# Altium PCB 2.4寸液晶屏-V1.PcbDoc
Units mm, origin at the board's own origin, x right, y up, seen from the top; angles counter-clockwise.
Board outline 42 x 88 mm, 2 copper layers (Top Layer, Bottom Layer), stack 1.571 mm thick; 22 components, 26 nets, 115 pads, 83 vias.
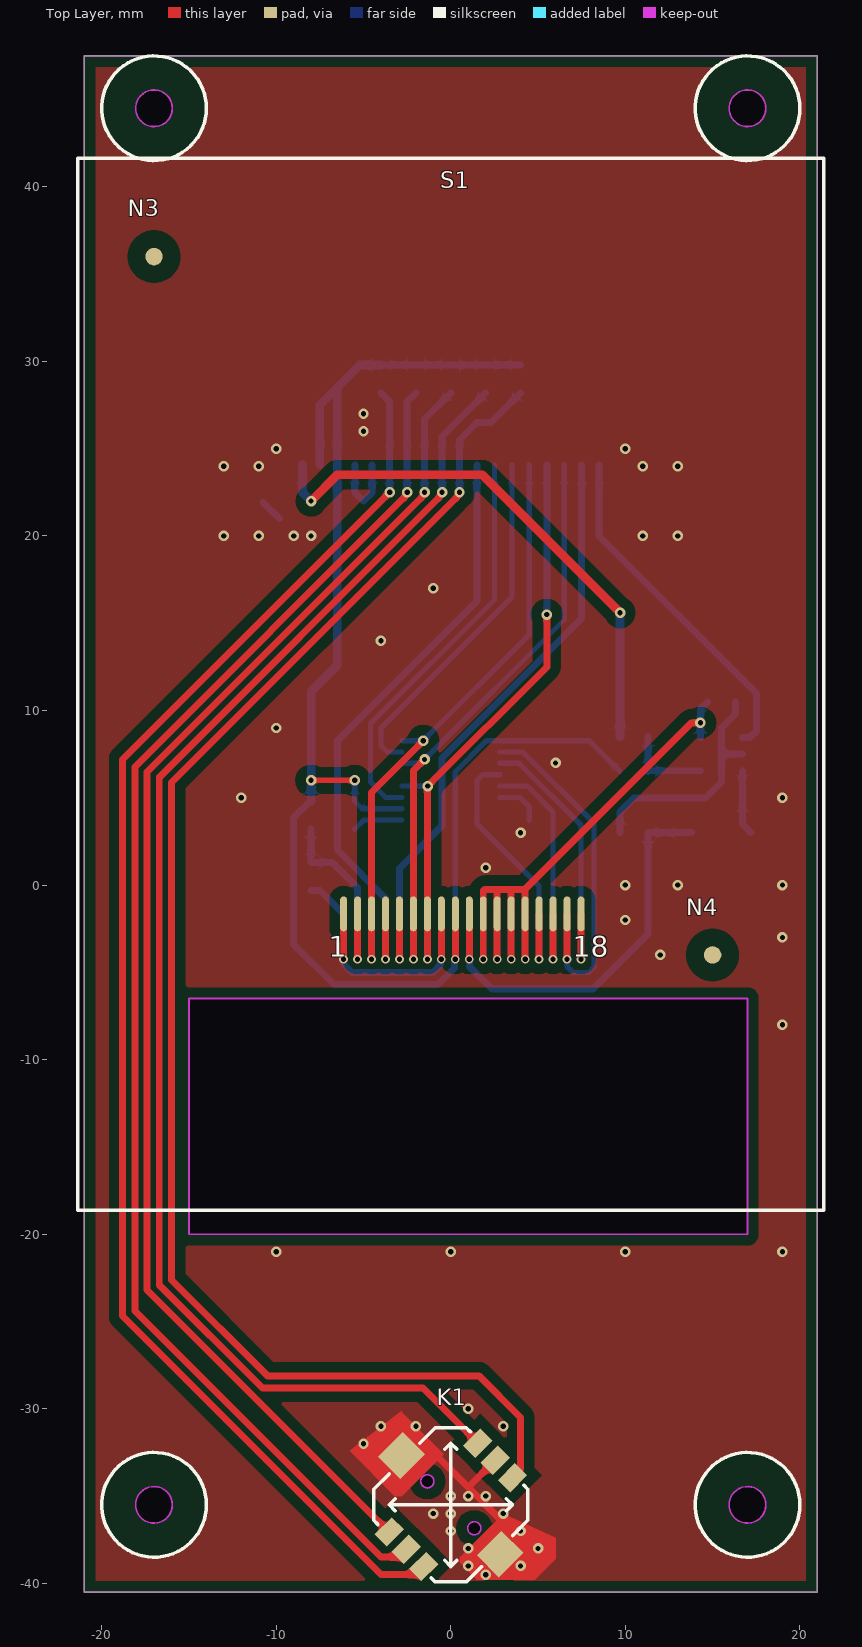
[diagram p0: Top Layer view]
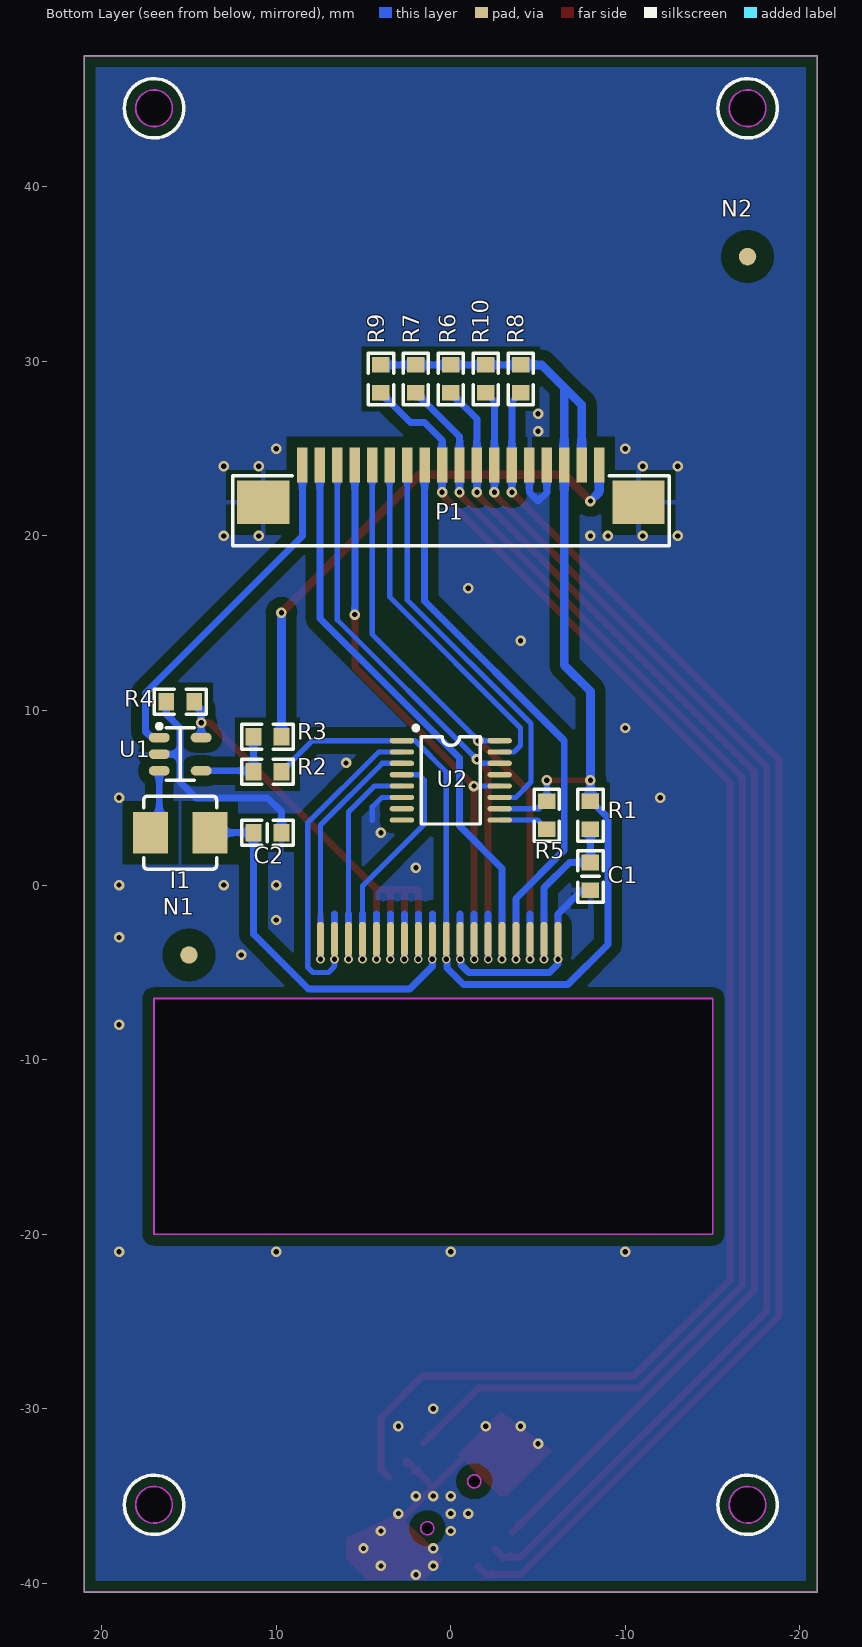
[diagram p1: Bottom Layer view, seen from below]
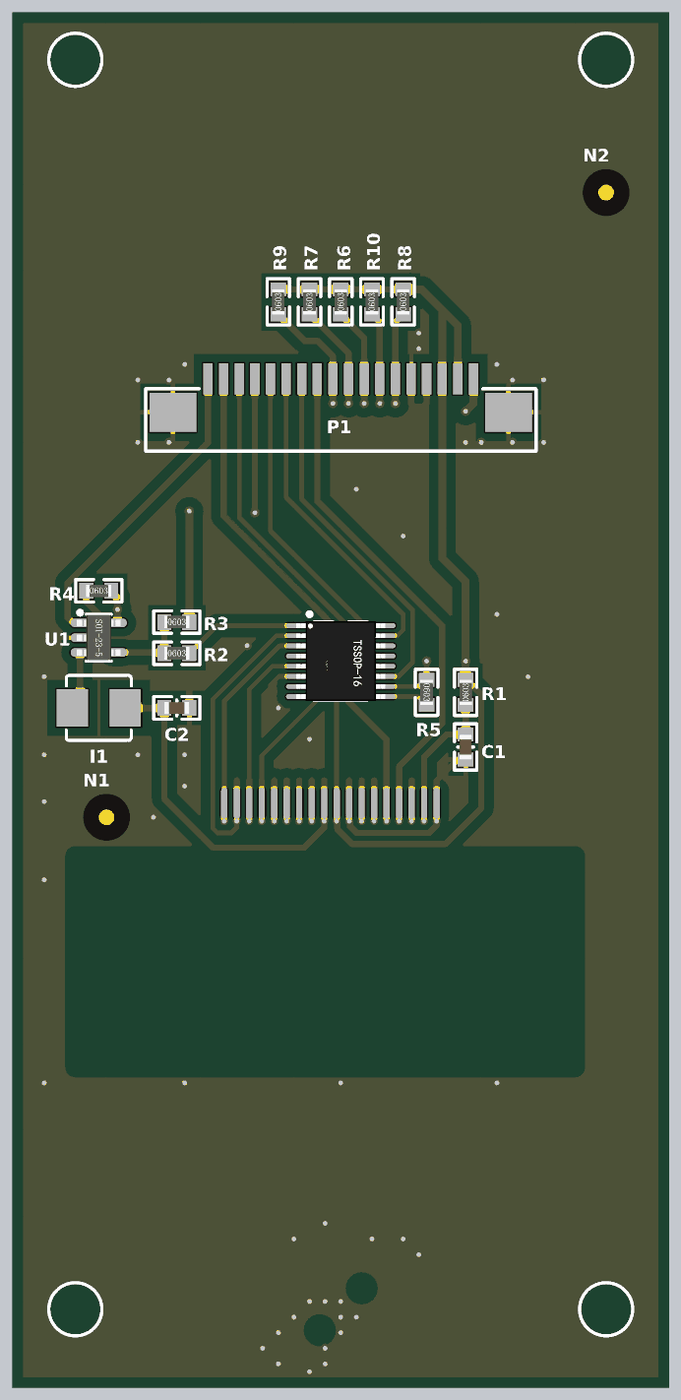
[diagram p2: 3D render of the assembled board from below, using the file's embedded part models]

## Layer stack, top to bottom
Top Solder: solder mask 0.0102, Solder Resist, Dk 3.5
Top Layer: signal copper 0.0356
Dielectric1: dielectric 1.5, FR-4, Dk 4.8
Bottom Layer: signal copper 0.0356
Bottom Solder: solder mask 0.0102, Solder Resist, Dk 3.5

## Board outline
-21,-40.5 21,-40.5 21,47.5 -21,47.5
cut-out: -15,-20 17,-20 17,-6.5 -15,-6.5
cut-out: -17,-36.55 cw(c-17,-35.5) -18.05,-35.5 cw(c-17,-35.5) -17,-34.45 cw(c-17,-35.5) -15.95,-35.5 cw(c-17,-35.5)
cut-out: 17,-36.55 cw(c17,-35.5) 15.95,-35.5 cw(c17,-35.5) 17,-34.45 cw(c17,-35.5) 18.05,-35.5 cw(c17,-35.5)
cut-out: -17,45.55 ccw(c-17,44.5) -18.05,44.5 ccw(c-17,44.5) -17,43.45 ccw(c-17,44.5) -15.95,44.5 ccw(c-17,44.5)
cut-out: 17,45.55 ccw(c17,44.5) 15.95,44.5 ccw(c17,44.5) 17,43.45 ccw(c17,44.5) 18.05,44.5 ccw(c17,44.5)

## Design rules (kind name [scope] priority, off if disabled: settings)
Clearance Clearance敷铜间隔 [InPolygon] p1: gap=0.6
Clearance Clearance通用间隔 [All] p2: gap=0.3
PlaneConnect [All] p1: planeconnectstyle=Relief reliefexpansion=0.508 reliefentries=4 reliefconductorwidth=0.3 reliefairgap=0.3
PolygonConnect PolygonConnect_过孔 [All vs IsVia] p1: connectstyle=Direct reliefconductorwidth=0.254 reliefentries=4 polygonreliefangle="90 Angle" airgapwidth=0.254
PolygonConnect [All] p2: connectstyle=Relief reliefconductorwidth=0.3 reliefentries=4 polygonreliefangle="90 Angle" airgapwidth=0.6
RoutingVias [All] p1: holewidth=0.5 width=1 viastyle="Through Hole" minholewidth=0.4 minwidth=0.8 maxholewidth=10 maxwidth=10
SolderMaskExpansion [All] p1: expansion=0.102
Width [All] p1: maxlimit=10 minlimit=0.3 preferedwidth=0.5
29 further rules are at their usual default settings.

## Components (designator, comment, footprint, x,y, rotation, side; value= is the part's Value field where it differs from the comment)
C1 "104" C-0603 -8,0.5 r90 bottom
C2 "106" C-0603 10.5,3 r0 bottom
I1 "2.2UH" 一体成型电感0420 15.5,3 r180 bottom
K1 "SKRHABE010" SKRHABE010 0,-35.5 r45 top
N1 "光学定位点" MARK-1mm-3mm 15,-4 r180 bottom
N2 "光学定位点" MARK-1mm-3mm -17,36 r180 bottom
N3 "光学定位点" MARK-1mm-3mm -17,36 r0 top
N4 "光学定位点" MARK-1mm-3mm 15,-4 r0 top
P1 "FPC-1.0mm-18P" FPC-1.0mm_18P下接翻盖 0,23 r0 bottom
R1 "10K" R-0603 -8,4 r90 bottom
R2 "NC" R-0603 10.5,6.5 r180 bottom
R3 "0" R-0603 10.5,8.5 r180 bottom
R4 "1.3" R-0603 15.5,10.5 r180 bottom
R5 "NC" R-0603 -5.5,4 r270 bottom
R6 "10K" R-0603 0,29 r90 bottom
R7 "10K" R-0603 2,29 r90 bottom
R8 "10K" R-0603 -4,29 r90 bottom
R9 "10K" R-0603 4,29 r90 bottom
R10 "10K" R-0603 -2,29 r90 bottom
S1 "HT024SQV003NH" HT024SQV003NH 0,11.5 r0 top locked
U1 "LN2401" SOT-23-5-n 15.5,7.5 r0 bottom
U2 "XPT2046" TSSOP-16 0,6 r270 bottom

## Footprints (in the part's own frame and the unit in brackets; to place one, negate y for a bottom-side part, rotate by r counter-clockwise, add the part's x,y. Pads: shape width x height; smd on the part's side, far side on the other; paste and mask are expansions set on the pad)
C-0603 [mm]
  rect 0.9x1 smd: 1(-0.8,0) 2(0.8,0)
  silkscreen extent -1.48,-0.72 1.48,0.72, body extent -0.8,-0.4 0.8,0.4, height 0.6
FPC-1.0mm_18P下接翻盖 [mm]
  rect 0.6x2 smd: 1(-8.5,-1.075) 2(-7.5,-1.075) 3(-6.5,-1.075) 4(-5.5,-1.075) 5(-4.5,-1.075) 6(-3.5,-1.075) 7(-2.5,-1.075) 8(-1.5,-1.075) 9(-0.5,-1.075) 10(0.5,-1.075) 11(1.5,-1.075) 12(2.5,-1.075) 13(3.5,-1.075) 14(4.5,-1.075) 15(5.5,-1.075) 16(6.5,-1.075) 17(7.5,-1.075) 18(8.5,-1.075)
  rect 3x2.5 smd: 19(-10.75,1.075) 20(10.75,1.075)
  silkscreen extent -12.51,-0.44 12.49,3.56
HT024SQV003NH [mm]
  oval 0.4x2 smd: 1(-6.14,-13.15) 2(-5.34,-13.15) 3(-4.54,-13.15) 4(-3.74,-13.15) 5(-2.94,-13.15) 6(-2.14,-13.15) 7(-1.34,-13.15) 8(-0.54,-13.15) 9(0.26,-13.15) 10(1.06,-13.15) 11(1.86,-13.15) 12(2.66,-13.15) 13(3.46,-13.15) 14(4.26,-13.15) 15(5.06,-13.15) 16(5.86,-13.15) 17(6.66,-13.15) 18(7.46,-13.15)
  silkscreen extent -21.36,-30.13 21.36,30.13, body extent -21.36,-30.13 21.36,30.13, height 3.45
MARK-1mm-3mm [mm]
  round 1 smd paste-0.6 mask+1: 1(0,0)
  Top Layer pour cut-out: -1.5,0 -1.386,-0.574 -1.061,-1.061 -0.574,-1.386 0,-1.5 0,-1.5 0.574,-1.386 1.061,-1.061 1.386,-0.574 1.5,0 1.5,0 1.386,0.574 1.061,1.061 0.574,1.386 0,1.5 0,1.5 -0.574,1.386 -1.061,1.061 -1.386,0.574 -1.5,0
R-0603 [mm]
  rect 0.9x1 smd: 1(-0.8,0) 2(0.8,0)
  silkscreen extent -1.48,-0.72 1.48,0.72, body extent -0.8,-0.4 0.8,0.4, height 0.45
SKRHABE010 [mm]
  rect 1.4x1 smd: 1(-3.6,1.4) 2(-3.6,0) 3(-3.6,-1.4) 4(3.6,1.4) 5(3.6,0) 6(3.6,-1.4)
  rect 2x1.8 smd: 7(0,4) 7(0,-4)
  Keep-Out Layer circle w0.1: c0,-1.9 r0.375
  Keep-Out Layer circle w0.1: c0,1.9 r0.375
  Keep-Out Layer board cut-out: -0.375,-1.9 -0.346,-2.044 -0.265,-2.165 -0.144,-2.246 0,-2.275 0,-2.275 0.144,-2.246 0.265,-2.165 0.346,-2.044 0.375,-1.9 0.375,-1.9 0.346,-1.756 0.265,-1.635 0.144,-1.554 0,-1.525 0,-1.525 -0.144,-1.554 -0.265,-1.635 -0.346,-1.756 -0.375,-1.9
  Keep-Out Layer board cut-out: -0.375,1.9 -0.346,1.756 -0.265,1.635 -0.144,1.554 0,1.525 0,1.525 0.144,1.554 0.265,1.635 0.346,1.756 0.375,1.9 0.375,1.9 0.346,2.044 0.265,2.165 0.144,2.246 0,2.275 0,2.275 -0.144,2.246 -0.265,2.165 -0.346,2.044 -0.375,1.9
  silkscreen extent -3.75,-3.75 3.75,3.75
SOT-23-5-n [mm]
  oval 1.2x0.55 smd: 1(1.2,-0.95) 2(1.2,0) 3(1.2,0.95) 4(-1.2,0.95) 5(-1.2,-0.95)
  silkscreen extent -0.8,-1.7 1.3,1.5, body extent -1.4,-1.45 1.4,1.45, height 1.2
TSSOP-16 [mm]
  oval 0.3x1.4 smd: 1(-2.275,-2.8) 2(-1.625,-2.8) 3(-0.975,-2.8) 4(-0.325,-2.8) 5(0.325,-2.8) 6(0.975,-2.8) 7(1.625,-2.8) 8(2.275,-2.8) 9(2.275,2.8) 10(1.625,2.8) 11(0.975,2.8) 12(0.325,2.8) 13(-0.325,2.8) 14(-0.975,2.8) 15(-1.625,2.8) 16(-2.275,2.8)
  silkscreen extent -3.12,-2.13 2.5,1.7, body extent -2.55,-2.85 2.55,2.85, height 1.45
一体成型电感0420 [mm]
  rect 2x2.4 smd: 1(-1.7,0) 2(1.7,0)
  silkscreen extent -2.08,-2.08 2.08,2.08, body extent -2.08,-2.08 2.08,2.08, height 2

## Part data
C1: library part Cap-0603, "0805"
C2: library part Cap-0805, "0805"
I1: library part Inductance3
K1: "五向开关"
N1 N2 N3 N4: library part 无引脚
P1: library part "Header 20", "Header, 20-Pin"
R1 R2 R3 R5 R6 R7 R8 R9 R10: library part Res2-0603, "0603"
R4: library part Res2, "0805"
U1: library part PAM2804, "DC-DC降压"

## Free pads (board coordinates)
  oval 0.4x2 smd far side: 1(-6.14,-3.1) 2(-5.34,-3.1) 3(-4.54,-3.1) 4(-3.74,-3.1) 5(-2.94,-3.1) 6(-2.14,-3.1) 7(-1.34,-3.1) 8(-0.54,-3.1) 9(0.26,-3.1) 10(1.06,-3.1) 11(1.86,-3.1) 12(2.66,-3.1) 13(3.46,-3.1) 14(4.26,-3.1) 15(5.06,-3.1) 16(5.86,-3.1) 17(6.66,-3.1) 18(7.46,-3.1)

## Via types
v1: diameter 0.6, hole 0.3, Top Layer to Bottom Layer, tented both sides, 65 vias
v2: diameter 0.5, hole 0.3, Top Layer to Bottom Layer, tented both sides, 18 vias

## Nets (pads, with @x,y where several pads share a name; then routed paths per layer and width w, separated by ;. In a path a pad name is that pad's centre, name@x,y a point inside that pad or via, vN(x,y) a via of type N, cw(c..) or ccw(c..) an arc to the next point about the centre after c; other vN are vias at no path point)
3.3V: P1.2 P1.3 pad.9 R1.2 R2.2 R5.1 R6.2 R7.2 R8.2 R9.2 R10.2 S1.9 U2.1 U2.10 | length 90.8
  Top Layer w0.3: v1(-8,6) v1(-5.5,6)
  Top Layer w0.4: v2(0.26,-4.25) S1.9
  Bottom Layer w0.3: v1(-5.5,6) R5.1 -5.075,4.375 U2.10 ; pad.9 0.26,6.484 2.051,8.275 U2.1 7.925,8.275 R2.2
  Bottom Layer w0.4: R1.2 -8.057,4.8 -9,3.857 -9,-3.4 -6.7,-5.7 -0.739,-5.7 0.21,-4.751 0.21,-4.3 v2(0.26,-4.25) pad.9 ; R8.2 R10.2 R6.2 R7.2 R9.2
  Bottom Layer w0.5: R1.2 v1(-8,6) -8,11.1 -6.5,12.6 P1.3 -6.5,28.5 ; P1.2 -7.5,27.5 -6.5,28.5 ; R8.2 -5.2,29.8 -6.5,28.5
5V: P1.1 R3.2 | length 31
  Top Layer w0.5: v1(-8,22) -6.5,23.5 1.8,23.5 v1(9.7,15.6)
  Bottom Layer w0.5: P1.1 -8.5,22.5 v1(-8,22) ; R3.2 v1(9.7,15.6)
GND: C1.1 C2.1 K1.5 K1.7 P1.4 P1.5 P1.19 P1.20 pad.1 pad.8 R4.1 S1.1 S1.8 U1.2 U2.6 | length 53.4
  Top Layer w0.4: v2(-6.14,-4.25) S1.1 ; K1.7@-2.828,-32.672 -0.828,-32.672 1.1,-34.6 ; v2(-0.54,-4.25) S1.8 ; K1.5@2.546,-33.154 K1.5 1.1,-34.4 1.1,-34.6 ; K1.7@2.828,-38.328 2.828,-36.328 1.1,-34.6
  Bottom Layer w0.3: U2.6 3.957,5.025 4.5,4.482 4.5,3.7
  Bottom Layer w0.4: P1.19 P1.19@-9.825,21 ; C1.1 -7.49,-0.3 -6.14,-1.65 pad.1 v2(-6.14,-4.25) -6.14,-4.511 -5.651,-5 -1.029,-5 -0.59,-4.561 -0.59,-4.3 v2(-0.54,-4.25) pad.8 -0.54,-1.65 ; P1.4 -5.5,22.5 -5,22 -4.5,22.5 P1.5 ; C2.1 9.7,4.2 10.5,5 14.6,5 15.5,5.9 15.5,9 16.3,9.8 R4.1 ; 15.5,7.5 U1.2
  other v1: 2,-39.5 1,-39 4,-39 1,-38 5,-38 0,-37 4,-37 -1,-36 0,-36 3,-36 0,-35 1,-35 2,-35 -5,-32 -4,-31 -2,-31 3,-31 1,-30 -10,-21 0,-21 10,-21 19,-21 19,-8 12,-4 19,-3 10,-2 10,0 13,0 19,0 2,1 4,3 -12,5 19,5 6,7 -10,9 -4,14 -1,17 -13,20 -11,20 -9,20 -8,20 11,20 13,20 -13,24 -11,24 11,24 13,24 -10,25 10,25 -5,26 -5,27
MISO: P1.15 pad.7 S1.7 U2.12 | length 35.2
  Top Layer w0.4: v2(-1.34,-4.25) S1.7 -1.34,5.66 v1(-1.325,5.675) 5.5,12.5 v1(5.5,15.5)
  Bottom Layer w0.3: U2.12 v1(-1.325,5.675)
  Bottom Layer w0.4: v2(-1.34,-4.25) pad.7 -1.34,-1.65 ; v1(5.5,15.5) P1.15
MOSI: P1.16 pad.6 S1.6 U2.14 | length 35.9
  Top Layer w0.4: v2(-2.14,-4.25) S1.6 -2.14,6.56 v1(-1.5,7.2)
  Bottom Layer w0.3: U2.14 -1.725,6.975 v1(-1.5,7.2) 6.5,15.2 P1.16
  Bottom Layer w0.4: v2(-2.14,-4.25) pad.6 -2.14,-1.65
NetC1_2: C1.2 pad.2 R1.1 S1.2 | length 11.9
  Top Layer w0.4: v2(-5.34,-4.25) S1.2
  Bottom Layer w0.4: R1.1 C1.2 -6.79,1.3 -5.34,-0.15 pad.2 v2(-5.34,-4.25)
NetC2_2: C2.2 I1.2 pad.10 S1.10 | length 26
  Top Layer w0.4: v2(1.06,-4.25) S1.10
  Bottom Layer w0.4: 1.06,-1.65 pad.10 v2(1.06,-4.25) 1.06,-4.66 2.35,-5.95 8.15,-5.95 11.3,-2.8 C2.2 I1.2
NetI1_1: I1.1 U1.3 | length 3.8
  Bottom Layer w0.4: U1.3 16.7,3.5 I1.1
NetR2_1: R2.1 R3.1 U1.4 | length 5
  Bottom Layer w0.4: R3.1 R2.1 11.35,6.55 U1.4
NetR4_2: pad.11 pad.12 pad.13 pad.14 R4.2 S1.11 S1.12 S1.13 S1.14 U1.5 | length 44.9
  Top Layer w0.4: v2(1.86,-4.25) S1.11 1.86,-0.34 1.96,-0.24 4.26,-0.24 ; v2(2.66,-4.25) S1.12 2.66,-0.28 ; v2(3.46,-4.25) S1.13 3.46,-0.28 ; v2(4.26,-4.25) S1.14 4.26,-0.24 ; v1(14.3,9.3) 13.8,9.3 4.26,-0.24
  Bottom Layer w0.4: v2(1.86,-4.25) pad.11 1.86,-1.65 ; v2(2.66,-4.25) pad.12 2.66,-1.65 ; v2(3.46,-4.25) pad.13 3.46,-1.65 ; v2(4.26,-4.25) pad.14 4.26,-1.65 ; U1.5 14.3,10.1 R4.2
NetR5_2: R5.2 U2.9 | length 2.9
  Bottom Layer w0.3: R5.2 -4.975,3.725 U2.9
RS/AO: P1.11 pad.4 S1.4 | length 35.4
  Top Layer w0.4: v2(-3.74,-4.25) S1.4
  Bottom Layer w0.4: v2(-3.74,-4.25) pad.4 -3.74,-0.76 -6.5,2 -6.5,8.268 1.5,16.268 P1.11
SCK: P1.14 pad.3 S1.3 U2.16 | length 35.9
  Top Layer w0.4: v2(-4.54,-4.25) S1.3 -4.54,5.309 v1(-1.574,8.275)
  Bottom Layer w0.3: U2.16 v1(-1.574,8.275) 4.5,14.349 P1.14
  Bottom Layer w0.4: v2(-4.54,-4.25) pad.3 -4.54,-1.65
XN: pad.15 S1.15 U2.4 | length 15.8
  Top Layer w0.4: v2(5.06,-4.25) S1.15
  Bottom Layer w0.3: U2.4 1.825,6.325 1.5,6 1.5,3.5 5.06,-0.06 5.06,-1.65
  Bottom Layer w0.4: v2(5.06,-4.25) pad.15 5.06,-1.65
XP: pad.17 S1.17 U2.2 | length 22.8
  Top Layer w0.4: v2(6.66,-4.25) S1.17
  Bottom Layer w0.3: U2.2 4.124,7.625 8.2,3.549 8.2,-4.7 7.9,-5 7,-5 6.66,-4.66 v2(6.66,-4.25) pad.17@6.66,-3.5
  Bottom Layer w0.4: pad.17@6.66,-3.5 pad.17 6.66,-1.65
YN: pad.16 S1.16 U2.5 | length 14.7
  Top Layer w0.4: v2(5.86,-4.25) S1.16
  Bottom Layer w0.3: U2.5 4.376,5.675 5.86,4.191 5.86,-1.65
  Bottom Layer w0.4: v2(5.86,-4.25) pad.16 5.86,-1.65
YP: pad.18 S1.18 U2.3 | length 16.4
  Top Layer w0.4: v2(7.46,-4.25) S1.18
  Bottom Layer w0.3: U2.3 3.925,6.975 7.46,3.44 pad.18
  Bottom Layer w0.4: v2(7.46,-4.25) pad.18
屏幕CS: P1.17 pad.5 S1.5 | length 35.2
  Top Layer w0.4: v2(-2.94,-4.25) S1.5
  Bottom Layer w0.4: v2(-2.94,-4.25) pad.5 -2.94,0.96 -0.5,3.4 -0.5,7.281 7.5,15.281 P1.17
按键-上: K1.1 P1.8 R6.1 | length 78.2
  Top Layer w0.4: K1.1 -17.4,-23.191 -17.4,6.469 -1.5,22.369 v1(-1.5,22.5)
  Bottom Layer w0.4: v1(-1.5,22.5) P1.8 -1.5,26.7 R6.1
按键-下: K1.4 P1.9 R7.1 | length 80.9
  Top Layer w0.4: v1(-0.5,22.5) -0.5,22.369 -16.7,6.169 -16.7,-22.901 -10.792,-28.809 -1.6,-28.809 K1.4
  Bottom Layer w0.4: v1(-0.5,22.5) P1.9 -0.5,25.7 R7.1
按键-中: K1.2 P1.7 R10.1 | length 80.9
  Top Layer w0.4: K1.2 -3,-38.5 -4,-38.5 -18.1,-24.4 -18.1,6.769 -2.5,22.369 v1(-2.5,22.5)
  Bottom Layer w0.4: v1(-2.5,22.5) P1.7 -2.5,27.7 R10.1
按键-右: K1.6 P1.10 R9.1 | length 86.5
  Top Layer w0.4: v1(0.5,22.5) 0.5,22.369 -16,5.869 -16,-22.611 -10.502,-28.109 1.609,-28.109 4,-30.5 4,-33.48 K1.6
  Bottom Layer w0.4: v1(0.5,22.5) P1.10 0.5,25.5 1.5,26.5 2.3,26.5 R9.1
按键-左: K1.3 P1.6 R8.1 | length 83
  Top Layer w0.4: v1(-3.5,22.5) -18.8,7.2 -18.8,-24.69 -3.99,-39.5 -2.02,-39.5 K1.3
  Bottom Layer w0.4: R8.1 -3.5,27.7 P1.6 v1(-3.5,22.5)
背光使能: P1.18 U1.1 | length 19.9
  Bottom Layer w0.4: P1.18 8.5,20 17.5,11 17.5,8.8 17.15,8.45 U1.1
触摸CS: P1.13 U2.15 | length 20.5
  Bottom Layer w0.3: U2.15 -3.625,7.625 -4,8 -4,9 3.5,16.5 P1.13
触摸中断: P1.12 U2.11 | length 23.3
  Bottom Layer w0.3: U2.11 -3.725,5.025 -4.6,5.9 -4.6,9.249 2.5,16.349 P1.12
pads on no net: N1.1 N2.1 N3.1 N4.1 U2.7 U2.8 U2.13

## Polygon pours and split planes (outlines as drawn)
GND on Top Layer "Mechanical 15-No Net" (solid, remove dead copper, pour order 0): 21,47.5 -21,47.5 -21,-40.5 21,-40.5
GND on Bottom Layer "Mechanical 15-No Net" (solid, remove dead copper, pour order 2): -21,-40.5 21,-40.5 21,47.5 -21,47.5

## Keep-outs
Keep-Out Layer:
  circle w0.1: c-17,-35.5 r1.05
  circle w0.1: c17,-35.5 r1.05
  circle w0.1: c-17,44.5 r1.05
  circle w0.1: c17,44.5 r1.05
  lines w0.1: -21,-40.5 21,-40.5 21,47.5 -21,47.5 -21,-40.5 ; -15,-20 -15,-6.5 17,-6.5 17,-20 -15,-20

## Other copper
Top Layer:
  region net GND: -2.8,-30.1 -2.8,-30.2 -0.4,-32.6 -2.8,-35 -3.2,-35 -5.8,-32.4
  region net GND: 3,-36 0.5,-38.5 0.5,-38.8 1.5,-39.8 4.8,-39.8 6,-38.6 6,-37.4
  pour cut-out: -20,-35.5 cw(c-17,-35.5) -17,-32.5 cw(c-17,-35.5) -14,-35.5 cw(c-17,-35.5) -17,-38.5 cw(c-17,-35.5)
  pour cut-out: -18.7,-35.5 cw(c-17,-35.5) -17,-33.8 cw(c-17,-35.5) -15.3,-35.5 cw(c-17,-35.5) -17,-37.2 cw(c-17,-35.5)
  pour cut-out: 14,-35.5 cw(c17,-35.5) 17,-32.5 cw(c17,-35.5) 20,-35.5 cw(c17,-35.5) 17,-38.5 cw(c17,-35.5)
  pour cut-out: 15.3,-35.5 cw(c17,-35.5) 17,-33.8 cw(c17,-35.5) 18.7,-35.5 cw(c17,-35.5) 17,-37.2 cw(c17,-35.5)
  pour cut-out: -20,44.5 ccw(c-17,44.5) -17,41.5 ccw(c-17,44.5) -14,44.5 ccw(c-17,44.5) -17,47.5 ccw(c-17,44.5)
  pour cut-out: -18.7,44.5 ccw(c-17,44.5) -17,42.8 ccw(c-17,44.5) -15.3,44.5 ccw(c-17,44.5) -17,46.2 ccw(c-17,44.5)
  pour cut-out: 14,44.5 ccw(c17,44.5) 17,41.5 ccw(c17,44.5) 20,44.5 ccw(c17,44.5) 17,47.5 ccw(c17,44.5)
  pour cut-out: 15.3,44.5 ccw(c17,44.5) 17,42.8 ccw(c17,44.5) 18.7,44.5 ccw(c17,44.5) 17,46.2 ccw(c17,44.5)

## Silkscreen, mask and mechanical layers (free items; w line width, h text height)
Top Overlay:
  circle w0.2: c-17,-35.5 r3
  circle w0.2: c17,-35.5 r3
  circle w0.2: c-17,44.5 r3
  circle w0.2: c17,44.5 r3
Bottom Overlay:
  circle w0.2: c-17,-35.5 r1.7
  circle w0.2: c17,-35.5 r1.7
  circle w0.2: c-17,44.5 r1.7
  circle w0.2: c17,44.5 r1.7
Mechanical 15:
  lines w0.1: -84,13.5 70,13.5 ; 0,-52.5 0,64.5
  lines w0.2: -90,-125 -2,-125 ; -90,-119 -2,-119 ; -90,-113 -2,-113 ; -90,-107 -2,-107 ; -90,-101 -2,-101 ; -90,-95 -2,-95 ; -90,-89 -2,-89 ; -68,-131 -68,-83 -68,-77 ; -90,-83 -90,-131 -2,-131 -2,-83 ; -90,-83 -2,-83 ; -90,-83 -90,-77 -2,-77 -2,-83
  text "公司" at -89,-82 h5
  text "杭州久天科技有限公司" at -65,-82 h5
  text "工程" at -89,-88 h5
  text "设计" at -89,-94 h5
  text "邵宁鹏" at -65,-94 h5
  text "日期" at -89,-100 h5
  text "板厚" at -89,-106 h5
  text "1.6mm" at -65,-106 h5
  text "阻焊油" at -89,-112 h5
  text "绿色" at -65,-112 h5
  text "丝印" at -89,-118 h5
  text "白色" at -65,-118 h5
  text "板材" at -89,-124 h5
  text "FR-4" at -65,-124 h5
  text "其他" at -89,-130 h5
  text "有铅喷锡，过孔盖油" at -65,-130 h5

## Dimensions
21,-40.5 to 21,47.5 on Mechanical 15
-21,-40.5 to 21,-40.5 on Mechanical 15

## Text inside footprints (layer, text, board x,y; h text height)
S1: Top Overlay "1" at -7,-4.5 h2; Top Overlay "18" at 7,-4.5 h2